# Altium PCB 1069.PcbDoc (part 1 of 3)
Units mil, origin at the board's own origin, x right, y up, seen from the top; angles counter-clockwise.
Board outline 10010 x 6010 mil, 2 copper layers (Top Layer, Bottom Layer); 500 components, 334 nets, 1630 pads, 397 vias.
Unrouted connection lines stored in the file: 1187.
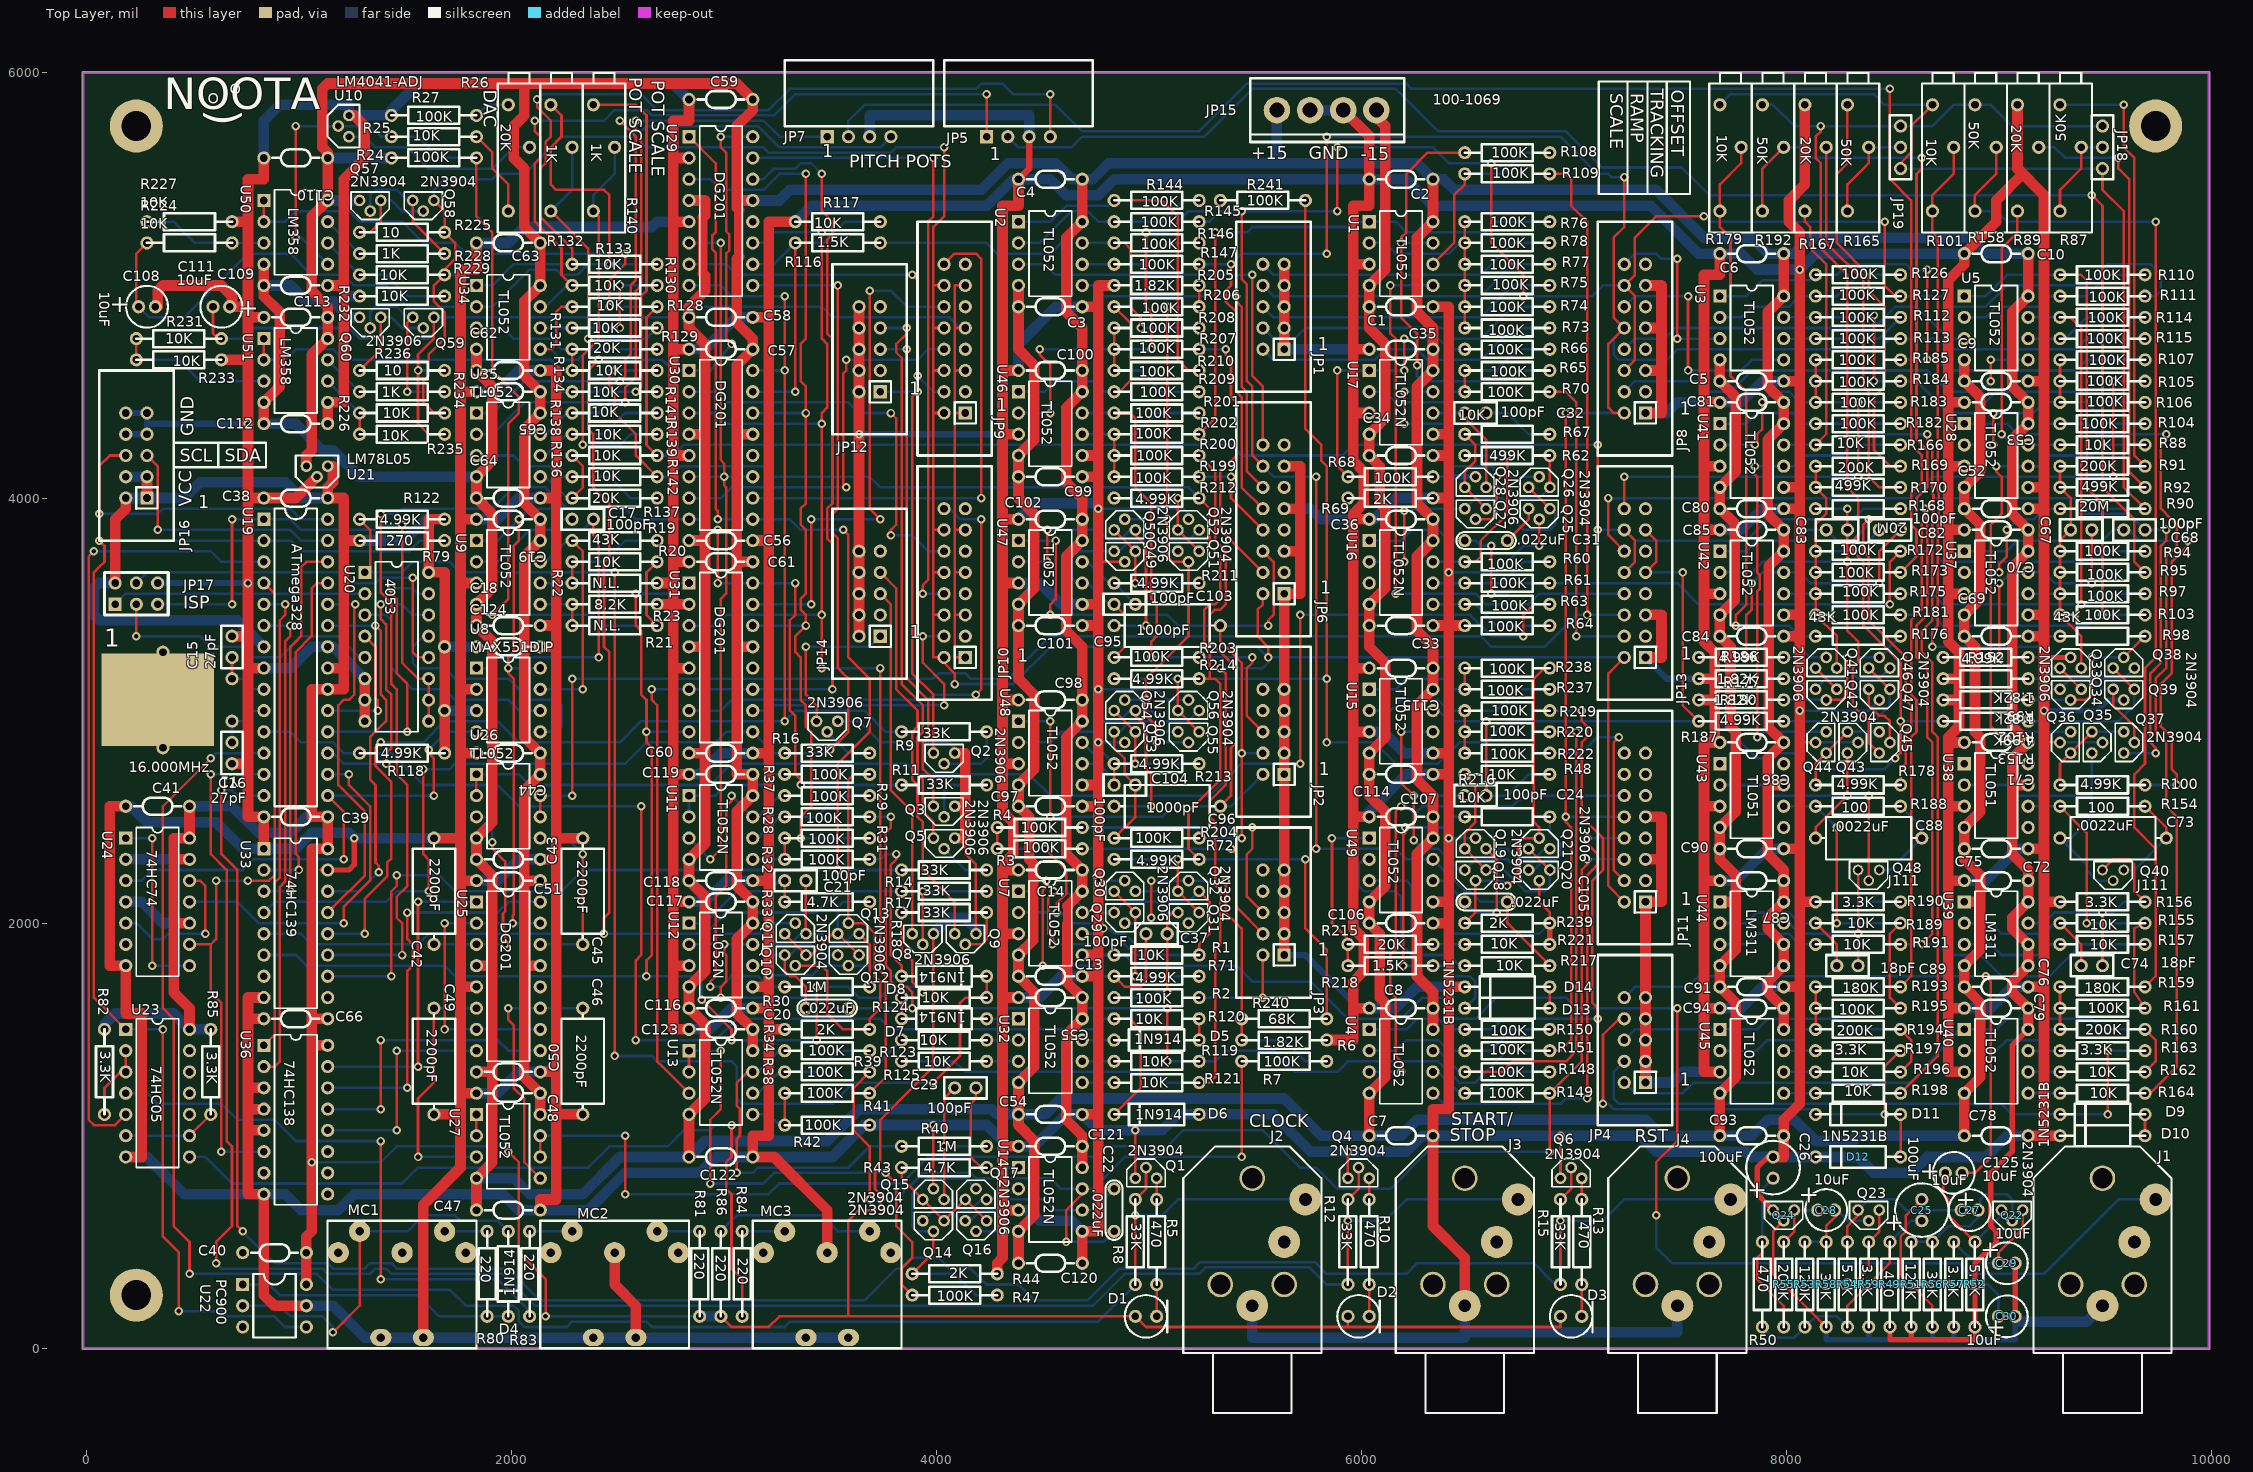
[diagram p0: Top Layer view]
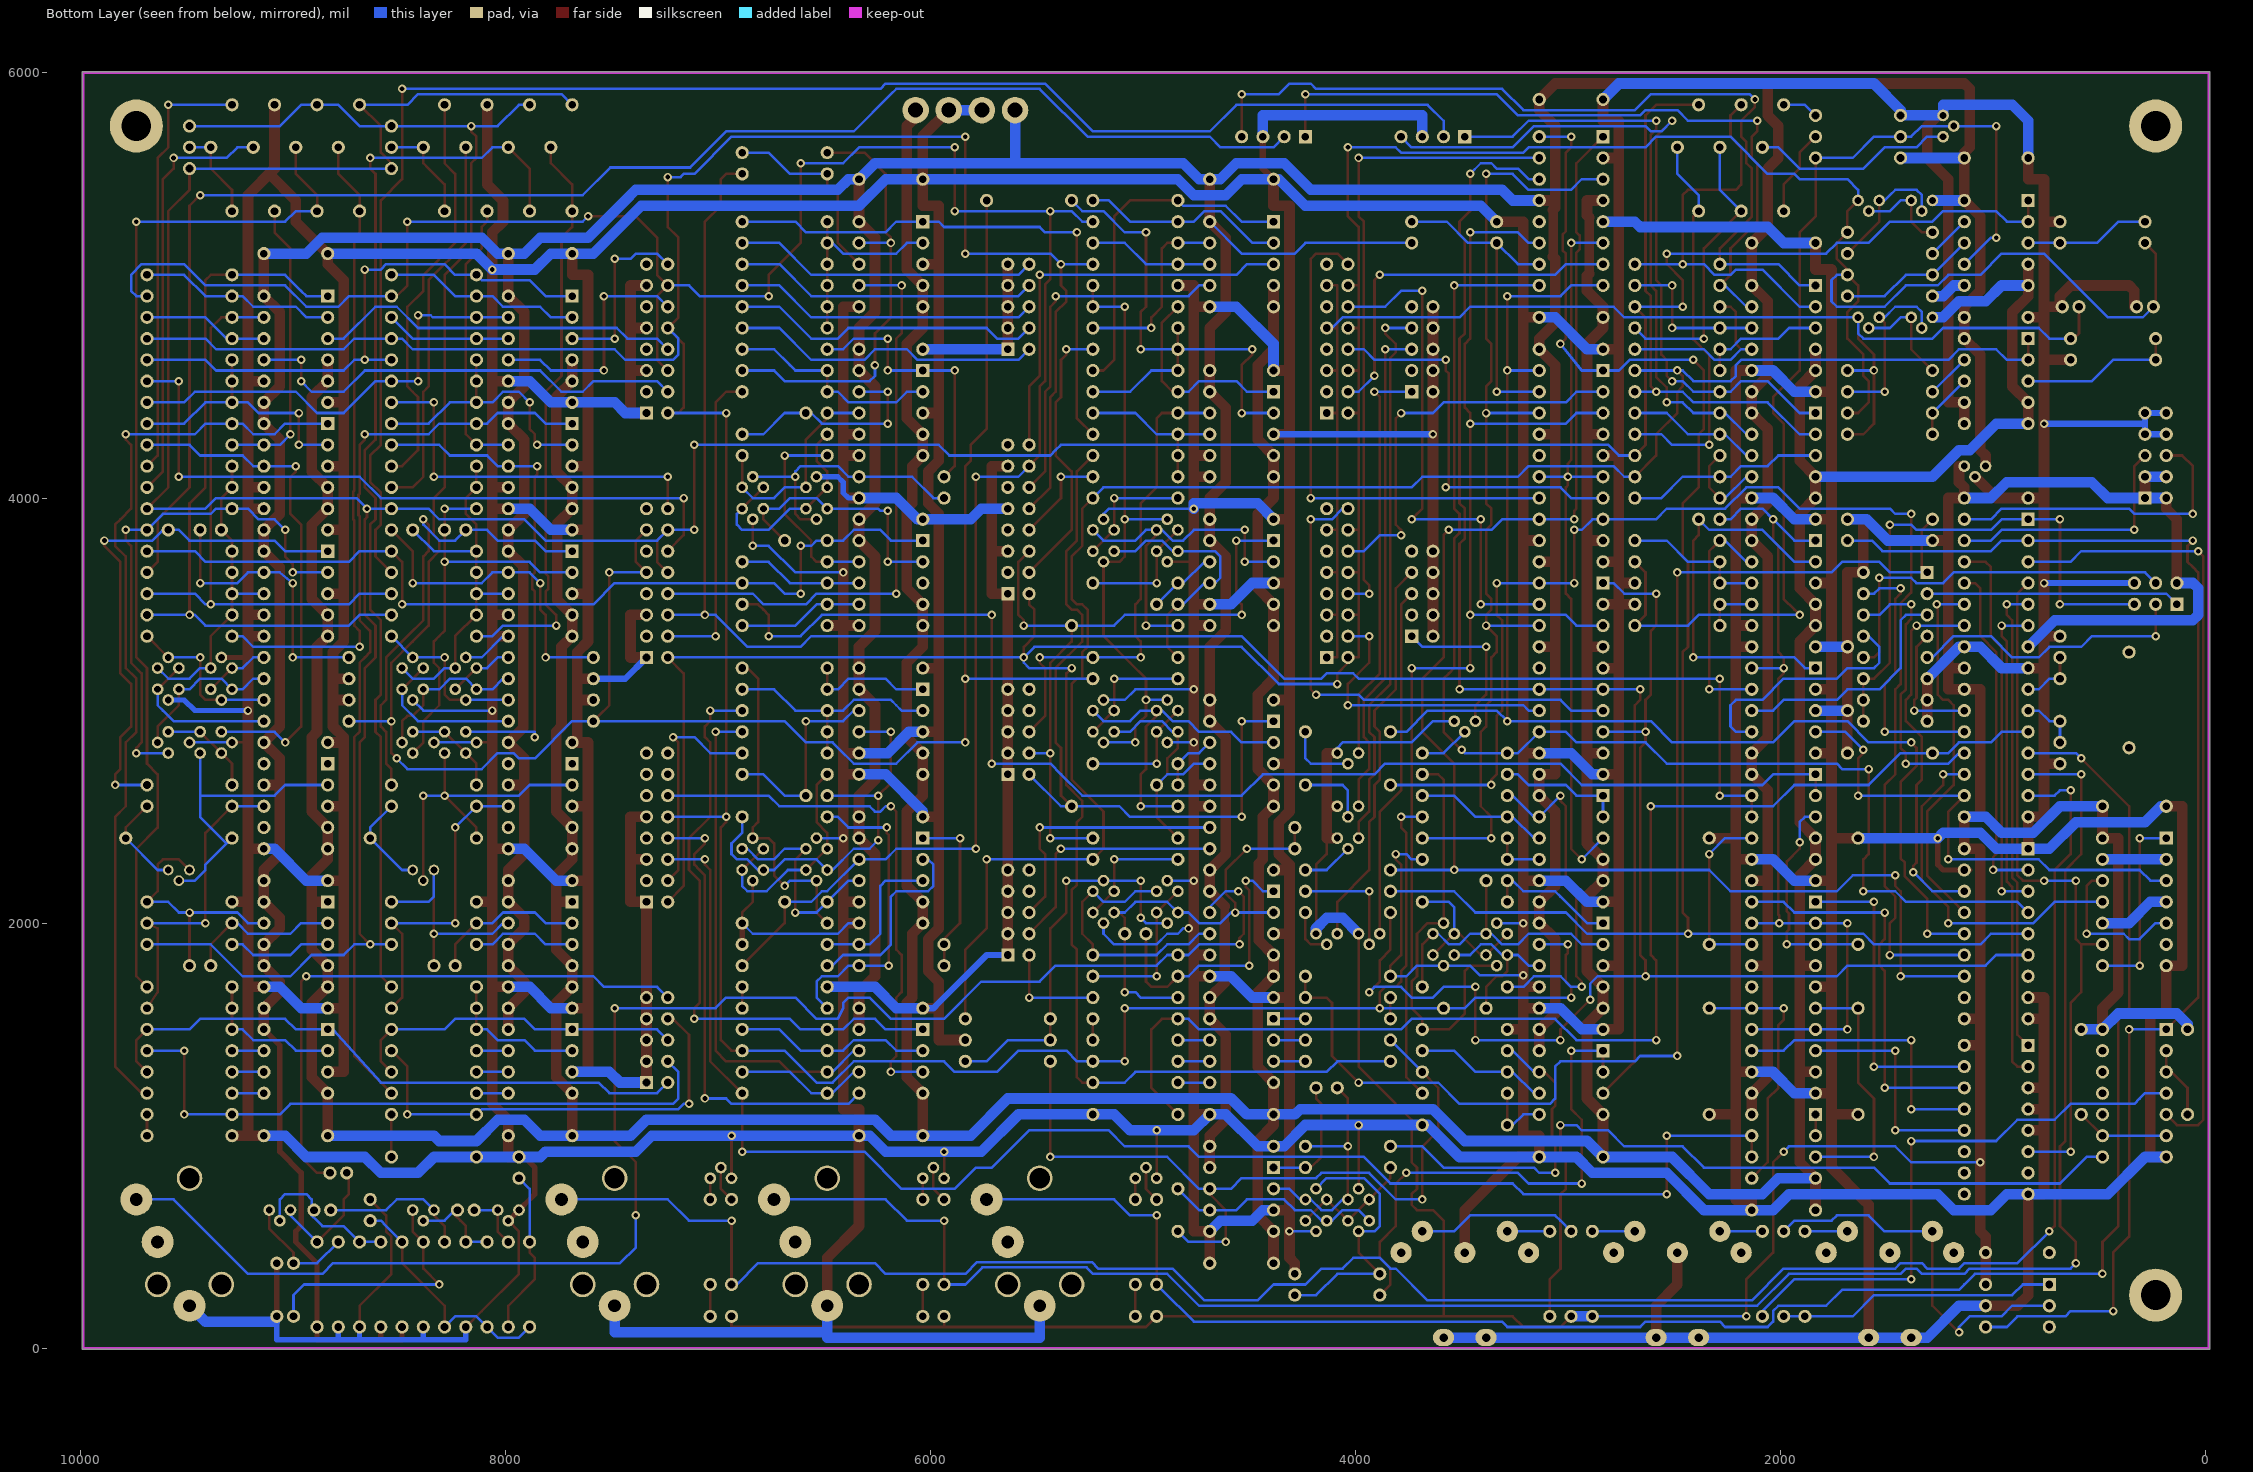
[diagram p1: Bottom Layer view, seen from below]

## Layer stack, top to bottom
Top Layer: signal copper 1.4
Dielectric: dielectric 12.6, FR-4, Dk 4.8
Bottom Layer: signal copper 1.4

## Board outline
-20,-5 9990,-5 9990,6005 -20,6005

## Design rules (kind name [scope] priority, off if disabled: settings)
Clearance [All] p1: gap=10
PlaneClearance [All] p1: clearance=10
PolygonConnect [All] p1: connectstyle=Relief reliefconductorwidth=10 reliefentries=4 polygonreliefangle="90 Angle"
RoutingPriority [All] p1: routingpriority=2
RoutingVias [All] p1: holewidth=20 width=50 viastyle="Through Hole" minholewidth=28 minwidth=50 maxholewidth=28 maxwidth=50
SilkscreenOverComponentPads [All] p1: minsilkscreentomaskgap=10
SolderMaskExpansion [All] p1: expansion=2
TestPointUsage [All] p1: valid=0 allowmultiple=FALSE
Testpoint [All] p1: side=15 testpointundercomponent=TRUE minsize=40 maxsize=100 preferedsize=60 minholesize=0 maxholesize=40 preferedholesize=32 testpointgrid=1 style=1023 order=0-112345678
Width [All] p1: maxlimit=10 minlimit=10 preferedwidth=10
21 further rules are at their usual default settings.

## Components (designator, comment, footprint, x,y, rotation, side; value= is the part's Value field where it differs from the comment)
C1 "0.1uF" AXIALCAP0.3 6035,4900 r0 top
C2 "0.1uF" AXIALCAP0.3 6335,5500 r180 top
C3 "0.1uF" AXIALCAP0.3 4385,4900 r0 top
C4 "0.1uF" AXIALCAP0.3 4685,5500 r180 top
C5 "0.1uF" AXIALCAP0.3 7685,4550 r0 top
C6 "0.1uF" AXIALCAP0.3 7985,5150 r180 top
C7 "0.1uF" AXIALCAP0.3 6035,1000 r0 top
C8 "0.1uF" AXIALCAP0.3 6335,1600 r180 top
C9 "0.1uF" AXIALCAP0.3 8835,4550 r0 top
C10 "0.1uF" AXIALCAP0.3 9135,5150 r180 top
C13 "0.1uF" AXIALCAP0.3 4385,1750 r0 top
C14 "0.1uF" AXIALCAP0.3 4685,2250 r180 top
C15 "27pF" RAD0.1 685,3250 r90 top
C16 "27pF" RAD0.1 685,2850 r270 top
C17 "100pF" RAD0.1 2285,3900 r0 top
C18 "0.1uF" AXIALCAP0.3 1835,3400 r0 top
C19 "0.1uF" AXIALCAP0.3 2135,3900 r180 top
C20 ".022uF" CAP-MY0.2X.1 3385,1600 r0 top
C21 "100pF" RAD0.1 3385,2200 r180 top
C22 ".022uF" CAP-MY0.2X.1 4835,750 r270 top
C23 "100pF" RAD0.1 4085,1225 r0 top
C24 "100pF" RAD0.1 6485,2600 r0 top
C25 "100uF" RB0.3/0.1 8635,600 r90 top
C26 "100uF" RB0.3/0.1 7935,800 r90 top
C27 "10uF" RB5/2 8860,650 r0 top
C28 "10uF" RB5/2 8185,650 r0 top
C29 "10uF" RB5/2 9035,400 r0 top
C30 "10uF" RB5/2 9035,150 r0 top
C31 ".022uF" CAP-MY0.2X.1 6685,3800 r180 top
C32 "100pF" RAD0.1 6485,4400 r0 top
C33 "0.1uF" AXIALCAP0.3 6035,3400 r0 top
C34 "0.1uF" AXIALCAP0.3 6035,4200 r0 top
C35 "0.1uF" AXIALCAP0.3 6335,4700 r180 top
C36 "0.1uF" AXIALCAP0.3 6335,3900 r180 top
C37 "100pF" RAD0.1 5085,1950 r180 top
C38 "0.1uF" AXIALCAP0.3 1135,4000 r180 top
C39 "0.1uF" AXIALCAP0.3 1135,2500 r180 top
C40 "0.1uF" AXIALCAP0.3 1035,450 r180 top
C41 ".1uF" AXIALCAP0.3 485,2550 r180 top
C42 "2200pF" AXIAL0.5X0.2 1635,1900 r90 top
C43 "0.1uF" AXIALCAP0.3 1835,2300 r0 top
C44 "0.1uF" AXIALCAP0.3 2135,2800 r180 top
C45 "2200pF" AXIAL0.5X0.2 2335,1900 r90 top
C46 "2200pF" AXIAL0.5X0.2 2335,1600 r270 top
C47 "0.1uF" AXIALCAP0.3 1835,650 r0 top
C48 "0.1uF" AXIALCAP0.3 2135,1200 r180 top
C49 "2200pF" AXIAL0.5X0.2 1635,1600 r270 top
C50 "0.1uF" AXIALCAP0.3 1835,1300 r0 top
C51 "0.1uF" AXIALCAP0.3 2135,2200 r180 top
C52 "0.1uF" AXIALCAP0.3 8835,3950 r0 top
C53 "0.1uF" AXIALCAP0.3 9135,4450 r180 top
C54 "0.1uF" AXIALCAP0.3 4385,1100 r0 top
C55 "0.1uF" AXIALCAP0.3 4685,1650 r180 top
C56 "0.1uF" AXIALCAP0.3 2835,3800 r0 top
C57 "0.1uF" AXIALCAP0.3 3135,4700 r180 top
C58 "0.1uF" AXIALCAP0.3 2835,4850 r0 top
C59 "0.1uF" AXIALCAP0.3 3135,5875 r180 top
C60 "0.1uF" AXIALCAP0.3 2835,2800 r0 top
C61 "0.1uF" AXIALCAP0.3 3135,3700 r180 top
C62 "0.1uF" AXIALCAP0.3 1835,4600 r0 top
C63 "0.1uF" AXIALCAP0.3 2135,5200 r180 top
C64 "0.1uF" AXIALCAP0.3 1835,4000 r0 top
C65 "0.1uF" AXIALCAP0.3 2135,4500 r180 top
C66 "0.1uF" AXIALCAP0.3 1135,1550 r180 top
C67 "100pF" RAD0.1 9335,3850 r0 top
C68 "100pF" RAD0.1 9685,3850 r180 top
C69 "0.1uF" AXIALCAP0.3 8835,3350 r0 top
C70 "0.1uF" AXIALCAP0.3 9135,3850 r180 top
C71 "0.1uF" AXIALCAP0.3 9135,2850 r180 top
C72 "0.1uF" AXIALCAP0.3 9135,2200 r180 top
C73 ".0022uF" AXIAL0.5X0.2 9285,2400 r0 top
C74 "18pF" RAD0.1 9385,1800 r0 top
C75 "0.1uF" AXIALCAP0.3 8835,2350 r0 top
C76 "0.1uF" AXIALCAP0.3 8835,1700 r0 top
C78 "0.1uF" AXIALCAP0.3 8835,1000 r0 top
C79 "0.1uF" AXIALCAP0.3 9135,1600 r180 top
C80 "0.1uF" AXIALCAP0.3 7685,3950 r0 top
C81 "0.1uF" AXIALCAP0.3 7985,4450 r180 top
C82 "100pF" RAD0.1 8435,3850 r0 top
C83 "100pF" RAD0.1 8285,3850 r180 top
C84 "0.1uF" AXIALCAP0.3 7685,3350 r0 top
C85 "0.1uF" AXIALCAP0.3 7985,3850 r180 top
C86 "0.1uF" AXIALCAP0.3 7985,2850 r180 top
C87 "0.1uF" AXIALCAP0.3 7985,2200 r180 top
C88 ".0022uF" AXIAL0.5X0.2 8135,2400 r0 top
C89 "18pF" RAD0.1 8235,1800 r0 top
C90 "0.1uF" AXIALCAP0.3 7685,2350 r0 top
C91 "0.1uF" AXIALCAP0.3 7685,1700 r0 top
C93 "0.1uF" AXIALCAP0.3 7685,1000 r0 top
C94 "0.1uF" AXIALCAP0.3 7985,1600 r180 top
C95 "1000pF" AXIAL0.5X0.2 5335,3400 r180 top
C96 "1000pF" AXIAL0.5X0.2 5335,2550 r180 top
C97 "0.1uF" AXIALCAP0.3 4385,2550 r0 top
C98 "0.1uF" AXIALCAP0.3 4685,3050 r180 top
C99 "0.1uF" AXIALCAP0.3 4385,4100 r0 top
C100 "0.1uF" AXIALCAP0.3 4685,4600 r180 top
C101 "0.1uF" AXIALCAP0.3 4385,3400 r0 top
C102 "0.1uF" AXIALCAP0.3 4685,3900 r180 top
C103 "100pF" RAD0.1 4835,3500 r0 top
C104 "100pF" RAD0.1 4935,2650 r180 top
C105 ".022uF" CAP-MY0.2X.1 6485,2100 r0 top
C106 "0.1uF" AXIALCAP0.3 6035,2000 r0 top
C107 "0.1uF" AXIALCAP0.3 6335,2500 r180 top
C108 "10uF" RB5/2 285,4900 r0 top
C109 "0.1uF" AXIALCAP0.3 835,5000 r0 top
C110 "0.1uF" AXIALCAP0.3 1135,5600 r180 top
C111 "10uF" RB5/2 635,4900 r180 top
C112 "0.1uF" AXIALCAP0.3 835,4350 r0 top
C113 "0.1uF" AXIALCAP0.3 1135,4850 r180 top
C114 "0.1uF" AXIALCAP0.3 6035,2700 r0 top
C115 "0.1uF" AXIALCAP0.3 6335,3200 r180 top
C116 "0.1uF" AXIALCAP0.3 2835,1600 r0 top
C117 "0.1uF" AXIALCAP0.3 3135,2100 r180 top
C118 "0.1uF" AXIALCAP0.3 2835,2200 r0 top
C119 "0.1uF" AXIALCAP0.3 3135,2700 r180 top
C120 "0.1uF" AXIALCAP0.3 4385,400 r0 top
C121 "0.1uF" AXIALCAP0.3 4685,950 r180 top
C122 "0.1uF" AXIALCAP0.3 2835,900 r0 top
C123 "0.1uF" AXIALCAP0.3 3135,1500 r180 top
C124 "0.1uF" AXIALCAP0.3 1835,3300 r0 top
C125 "10uF" RB5/2 8785,825 r0 top
D1 "LED" LED 4985,150 r180 top
D2 "LED" LED 5985,150 r180 top
D3 "LED" LED 6985,150 r180 top
D4 "1N914" DIODE0.4 1985,150 r180 top
D5 "1N914" DIODE0.4 4835,1450 r90 top
D6 "1N914" DIODE0.4 4835,1100 r90 top
D7 "1N914" DIODE0.4 4235,1550 r270 top
D8 "1N914" DIODE0.4 4235,1750 r270 top
D9 "1N5231B" DIODE0.4 9285,1100 r90 top
D10 "1N5231B" DIODE0.4 9285,1000 r90 top
D11 "1N5231B" DIODE0.4 8135,1100 r90 top
D12 "1N5231B" DIODE0.4 8135,900 r90 top
D13 "1N5231B" DIODE0.4 6485,1600 r90 top
D14 "1N5231B" DIODE0.4 6485,1700 r90 top
J1 "PHONEJACK SW" PHONE-SC112A 9485,200 r270 top
J2 "PHONEJACK SW" PHONE-SC112A 5485,200 r270 top
J3 "PHONEJACK SW" PHONE-SC112A 6485,200 r270 top
J4 "PHONEJACK SW" PHONE-SC112A 7485,200 r270 top
JP1 "HEADER 5X2" IDC10-AMP 5635,4700 r90 top
JP2 "HEADER 5X2" IDC10-AMP 5635,2700 r90 top
JP3 "HEADER 5X2" IDC10-AMP 5635,1850 r90 top
JP4 "HEADER 5X2" IDC10-AMP 7335,1250 r90 top
JP5 "HEADER 4" MODU-4S-RA 4235,5600 r0 top
JP6 "HEADER 8X2" IDC16-AMP 5635,3550 r90 top
JP7 "HEADER 4" MODU-4S-RA 3485,5600 r0 top
JP8 "HEADER 8X2" IDC16-AMP 7335,4400 r90 top
JP9 "HEADER 8X2" IDC16-AMP 4135,4400 r90 top
JP10 "HEADER 8X2" IDC16-AMP 4135,3250 r90 top
JP11 "HEADER 8X2" IDC16-AMP 7335,2100 r90 top
JP12 "HEADER 5X2" IDC10-AMP 3735,4500 r90 top
JP13 "HEADER 8X2" IDC16-AMP 7335,3250 r90 top
JP14 "HEADER 5X2" IDC10-AMP 3735,3350 r90 top
JP15 "HEADER 4" MTA-4X0.156 5835,5825 r0 top
JP16 "HEADER 5X2" IDC10-AMP 285,4000 r90 top
JP17 "HEADER 3X2" JMPR6 135,3500 r90 top
JP18 "HEADER 3" JP3 9485,5550 r90 top
JP19 "HEADER 3" JP3 8535,5550 r90 top
MC1 "DIN 5" "DIN 5 PIN A"#1 1485,450 r0 top
MC2 "DIN 5" "DIN 5 PIN A"#2 2485,450 r0 top
MC3 "DIN 5" "DIN 5 PIN A"#1 3485,450 r0 top
Q1 "2N3904" TO92 4985,850 r180 top
Q2 "2N3906" TO92 4035,2750 r0 top
Q3 "2N3906" TO92 4035,2500 r0 top
Q4 "2N3904" TO92 5985,850 r180 top
Q5 "2N3906" TO92 4035,2350 r0 top
Q6 "2N3904" TO92 6985,850 r180 top
Q7 "2N3906" TO92 3485,2900 r0 top
Q8 "2N3906" TO92 3935,1900 r0 top
Q9 "2N3906" TO92 4135,1900 r0 top
Q10 "2N3904" TO92 3335,1800 r0 top
Q11 "2N3904" TO92 3335,2000 r180 top
Q12 "2N3906" TO92 3585,1800 r0 top
Q13 "2N3906" TO92 3585,2000 r180 top
Q14 "2N3904" TO92 3985,550 r0 top
Q15 "2N3904" TO92 3985,750 r180 top
Q16 "2N3906" TO92 4185,550 r0 top
Q17 "2N3906" TO92 4185,750 r180 top
Q18 "2N3904" TO92 6535,2200 r0 top
Q19 "2N3904" TO92 6535,2400 r180 top
Q20 "2N3906" TO92 6835,2200 r0 top
Q21 "2N3906" TO92 6835,2400 r180 top
Q22 "2N3904" TO92 9060,600 r0 top
Q23 "2N3904" TO92 8385,600 r0 top
Q24 "2N3904" TO92 7985,600 r0 top
Q25 "2N3904" TO92 6835,3900 r0 top
Q26 "2N3904" TO92 6835,4100 r180 top
Q27 "2N3906" TO92 6535,3900 r0 top
Q28 "2N3906" TO92 6535,4100 r180 top
Q29 "2N3906" TO92 4885,2000 r0 top
Q30 "2N3906" TO92 4885,2200 r180 top
Q31 "2N3904" TO92 5185,2000 r0 top
Q32 "2N3904" TO92 5185,2200 r180 top
Q33 "2N3906" TO92 9335,3250 r180 top
Q34 "2N3906" TO92 9335,3050 r0 top
Q35 "2N3904" TO92 9485,2850 r90 top
Q36 "2N3904" TO92 9285,2850 r270 top
Q37 "2N3904" TO92 9635,2850 r90 top
Q38 "2N3904" TO92 9585,3250 r180 top
Q39 "2N3904" TO92 9585,3050 r0 top
Q40 "J111" TO92-J111 9535,2200 r0 top
Q41 "2N3906" TO92 8185,3250 r180 top
Q42 "2N3906" TO92 8185,3050 r0 top
Q43 "2N3904" TO92 8335,2850 r90 top
Q44 "2N3904" TO92 8135,2850 r270 top
Q45 "2N3904" TO92 8485,2850 r90 top
Q46 "2N3904" TO92 8435,3250 r180 top
Q47 "2N3904" TO92 8435,3050 r0 top
Q48 "J111" TO92-J111 8385,2200 r0 top
Q49 "2N3906" TO92 4885,3700 r0 top
Q50 "2N3906" TO92 4885,3900 r180 top
Q51 "2N3904" TO92 5185,3700 r0 top
Q52 "2N3904" TO92 5185,3900 r180 top
Q53 "2N3906" TO92 4885,2850 r0 top
Q54 "2N3906" TO92 4885,3050 r180 top
Q55 "2N3904" TO92 5185,2850 r0 top
Q56 "2N3904" TO92 5185,3050 r180 top
Q57 "2N3904" TO92 1335,5350 r0 top
Q58 "2N3904" TO92 1585,5350 r0 top
Q59 "2N3906" TO92 1585,4800 r0 top
Q60 "2N3906" TO92 1335,4800 r0 top
R1 "10K" AXIAL0.4 5235,1850 r180 top
R2 "100K" AXIAL0.4 5235,1650 r180 top
R3 "100K" AXIAL0.4 4685,2350 r180 top
R4 "100K" AXIAL0.4 4685,2450 r180 top
R5 "470" AXIAL0.4 5035,700 r270 top
R6 "1.82K" AXIAL0.4 5435,1450 r0 top
R7 "100K" AXIAL0.4 5435,1350 r0 top
R8 "33K" AXIAL0.4 4935,300 r90 top
R9 "33K" AXIAL0.4 3835,2900 r0 top
R10 "470" AXIAL0.4 6035,700 r270 top
R11 "33K" AXIAL0.4 3835,2650 r0 top
R12 "33K" AXIAL0.4 5935,300 r90 top
R13 "470" AXIAL0.4 7035,700 r270 top
R14 "33K" AXIAL0.4 3835,2250 r0 top
R15 "33K" AXIAL0.4 6935,300 r90 top
R16 "33K" AXIAL0.4 3285,2800 r0 top
R17 "33K" AXIAL0.4 3835,2150 r0 top
R18 "33K" AXIAL0.4 3835,2050 r0 top
R19 "43K" AXIAL0.4 2685,3800 r180 top
R20 "10K" AXIAL0.4 2685,3700 r180 top
R21 "N.L." AXIAL0.4 2685,3400 r180 top
R22 "N.L." AXIAL0.4 2285,3600 r0 top
R23 "8.2K" AXIAL0.4 2285,3500 r0 top
R24 "10K" AXIAL0.4 1435,5600 r0 top
R25 "100K" AXIAL0.4 1435,5700 r0 top
R26 "20K" TRIMPOT-3006 1985,5850 r0 top
R27 "100K" AXIAL0.4 1435,5800 r0 top
R28 "100K" AXIAL0.4 3285,2500 r0 top
R29 "100K" AXIAL0.4 3685,2600 r180 top
R30 "1M" AXIAL0.4 3285,1700 r0 top
R31 "100K" AXIAL0.4 3685,2400 r180 top
R32 "100K" AXIAL0.4 3285,2300 r0 top
R33 "4.7K" AXIAL0.4 3285,2100 r0 top
R34 "2K" AXIAL0.4 3685,1500 r180 top
R37 "100K" AXIAL0.4 3285,2700 r0 top
R38 "100K" AXIAL0.4 3285,1300 r0 top
R39 "100K" AXIAL0.4 3685,1400 r180 top
R40 "1M" AXIAL0.4 3835,950 r0 top
R41 "100K" AXIAL0.4 3685,1200 r180 top
R42 "100K" AXIAL0.4 3285,1050 r0 top
R43 "4.7K" AXIAL0.4 4235,850 r180 top
R44 "2K" AXIAL0.4 3885,350 r0 top
R47 "100K" AXIAL0.4 3885,250 r0 top
R48 "10K" AXIAL0.4 6485,2700 r0 top
R49 "470" AXIAL0.4 8485,500 r270 top
R50 "470" AXIAL0.4 7885,100 r90 top
R51 "120K" AXIAL0.4 8585,100 r90 top
R52 "5.6K" AXIAL0.4 8885,100 r90 top
R53 "120K" AXIAL0.4 8085,100 r90 top
R54 "5.6K" AXIAL0.4 8285,100 r90 top
R55 "200K" AXIAL0.4 7985,100 r90 top
R56 "39K" AXIAL0.4 8685,500 r270 top
R57 "3.3K" AXIAL0.4 8785,500 r270 top
R58 "39K" AXIAL0.4 8185,500 r270 top
R59 "3.3K" AXIAL0.4 8385,500 r270 top
R60 "100K" AXIAL0.4 6885,3700 r180 top
R61 "100K" AXIAL0.4 6885,3600 r180 top
R62 "499K" AXIAL0.4 6485,4200 r0 top
R63 "100K" AXIAL0.4 6885,3500 r180 top
R64 "100K" AXIAL0.4 6885,3400 r180 top
R65 "100K" AXIAL0.4 6885,4600 r180 top
R66 "100K" AXIAL0.4 6885,4700 r180 top
R67 "10K" AXIAL0.4 6485,4300 r0 top
R68 "100K" AXIAL0.4 5935,4100 r0 top
R69 "2K" AXIAL0.4 5935,4000 r0 top
R70 "100K" AXIAL0.4 6885,4500 r180 top
R71 "4.99K" AXIAL0.4 4835,1750 r0 top
R72 "4.99K" AXIAL0.4 4835,2300 r0 top
R73 "100K" AXIAL0.4 6885,4800 r180 top
R74 "100K" AXIAL0.4 6885,4900 r180 top
R75 "100K" AXIAL0.4 6885,5000 r180 top
R76 "100K" AXIAL0.4 6485,5300 r0 top
R77 "100K" AXIAL0.4 6885,5100 r180 top
R78 "100K" AXIAL0.4 6885,5200 r180 top
R79 "270" AXIAL0.4 1285,3800 r0 top
R80 "220" AXIAL0.4 1885,550 r270 top
R81 "220" AXIAL0.4 2885,550 r270 top
R82 "3.3K" AXIAL0.4 85,1500 r270 top
R83 "220" AXIAL0.4 2085,150 r90 top
R84 "220" AXIAL0.4 3085,150 r90 top
R85 "3.3K" AXIAL0.4 585,1100 r90 top
R86 "220" AXIAL0.4 2985,550 r270 top
R87 "50K" TRIMPOT-3006 9285,5850 r0 top
R88 "10K" AXIAL0.4 9285,4250 r0 top
R89 "20K" TRIMPOT-3006 9085,5850 r0 top
R90 "20M" AXIAL0.4 9685,3950 r180 top
R91 "200K" AXIAL0.4 9685,4150 r180 top
R92 "499K" AXIAL0.4 9285,4050 r0 top
R94 "100K" AXIAL0.4 9685,3750 r180 top
R95 "100K" AXIAL0.4 9685,3650 r180 top
R97 "100K" AXIAL0.4 9685,3550 r180 top
R98 "43K" AXIAL0.4 9285,3350 r0 top
R99 "1.82K" AXIAL0.4 9135,3150 r180 top
R100 "4.99K" AXIAL0.4 9285,2650 r0 top
R101 "10K" TRIMPOT-3006 8685,5850 r0 top
R102 "1.82k" AXIAL0.4 9135,3050 r180 top
R103 "100K" AXIAL0.4 9685,3450 r180 top
R104 "100K" AXIAL0.4 9685,4350 r180 top
R105 "100K" AXIAL0.4 9685,4550 r180 top
R106 "100K" AXIAL0.4 9685,4450 r180 top
R107 "100K" AXIAL0.4 9685,4650 r180 top
R108 "100K" AXIAL0.4 6885,5625 r180 top
R109 "100K" AXIAL0.4 6885,5525 r180 top
R110 "100K" AXIAL0.4 9685,5050 r180 top
R111 "100K" AXIAL0.4 9685,4950 r180 top
R112 "100K" AXIAL0.4 8535,4850 r180 top
R113 "100K" AXIAL0.4 8535,4750 r180 top
R114 "100K" AXIAL0.4 9685,4850 r180 top
R115 "100K" AXIAL0.4 9685,4750 r180 top
R116 "1.5K" AXIAL0.4 3735,5200 r180 top
R117 "10K" AXIAL0.4 3735,5300 r180 top
R118 "4.99K" AXIAL0.4 1685,2800 r180 top
R119 "10K" AXIAL0.4 5235,1350 r180 top
R120 "10K" AXIAL0.4 5235,1550 r180 top
R121 "10K" AXIAL0.4 5235,1250 r180 top
R122 "4.99K" AXIAL0.4 1685,3900 r180 top
R123 "10K" AXIAL0.4 3835,1450 r0 top
R124 "10K" AXIAL0.4 3835,1650 r0 top
R125 "10K" AXIAL0.4 3835,1350 r0 top
R126 "100K" AXIAL0.4 8535,5050 r180 top
R127 "100K" AXIAL0.4 8535,4950 r180 top
R128 "10K" AXIAL0.4 2685,4900 r180 top
R129 "20K" AXIAL0.4 2685,4700 r180 top
R130 "10K" AXIAL0.4 2685,5000 r180 top
R131 "10K" AXIAL0.4 2285,4800 r0 top
R132 "1K" TRIMPOT-3006 2185,5850 r0 top
R133 "10K" AXIAL0.4 2685,5100 r180 top
R134 "10K" AXIAL0.4 2685,4600 r180 top
R136 "10K" AXIAL0.4 2685,4200 r180 top
R137 "20K" AXIAL0.4 2285,4000 r0 top
R138 "10K" AXIAL0.4 2685,4400 r180 top
R139 "10K" AXIAL0.4 2285,4300 r0 top
R140 "1K" TRIMPOT-3006 2385,5850 r0 top
R141 "10K" AXIAL0.4 2685,4500 r180 top
R142 "10K" AXIAL0.4 2685,4100 r180 top
R144 "100K" AXIAL0.4 5235,5400 r180 top
R145 "100K" AXIAL0.4 5235,5300 r180 top
R146 "100K" AXIAL0.4 5235,5200 r180 top
R147 "100K" AXIAL0.4 5235,5100 r180 top
R148 "100K" AXIAL0.4 6885,1300 r180 top
R149 "100K" AXIAL0.4 6885,1200 r180 top
R150 "100K" AXIAL0.4 6885,1500 r180 top
R151 "100K" AXIAL0.4 6885,1400 r180 top
R152 "4.99K" AXIAL0.4 8735,3250 r0 top
R153 "4.99K" AXIAL0.4 9135,2950 r180 top
R154 "100" AXIAL0.4 9685,2550 r180 top
R155 "10K" AXIAL0.4 9685,2000 r180 top
R156 "3.3K" AXIAL0.4 9685,2100 r180 top
R157 "10K" AXIAL0.4 9685,1900 r180 top
R158 "50K" TRIMPOT-3006 8885,5850 r0 top
R159 "180K" AXIAL0.4 9685,1700 r180 top
R160 "200K" AXIAL0.4 9285,1500 r0 top
R161 "100K" AXIAL0.4 9685,1600 r180 top
R162 "10K" AXIAL0.4 9685,1300 r180 top
R163 "3.3K" AXIAL0.4 9285,1400 r0 top
R164 "10K" AXIAL0.4 9685,1200 r180 top
R165 "50K" TRIMPOT-3006 8285,5850 r0 top
R166 "10K" AXIAL0.4 8135,4250 r0 top
R167 "20K" TRIMPOT-3006 8085,5850 r0 top
R168 "20M" AXIAL0.4 8535,3950 r180 top
R169 "200K" AXIAL0.4 8535,4150 r180 top
R170 "499K" AXIAL0.4 8135,4050 r0 top
R172 "100K" AXIAL0.4 8535,3750 r180 top
R173 "100K" AXIAL0.4 8535,3650 r180 top
R175 "100K" AXIAL0.4 8535,3550 r180 top
R176 "43K" AXIAL0.4 8135,3350 r0 top
R177 "1.82K" AXIAL0.4 7985,3150 r180 top
R178 "4.99K" AXIAL0.4 8135,2650 r0 top
R179 "10K" TRIMPOT-3006 7685,5850 r0 top
R180 "1.82k" AXIAL0.4 7985,3050 r180 top
R181 "100K" AXIAL0.4 8535,3450 r180 top
R182 "100K" AXIAL0.4 8535,4350 r180 top
R183 "100K" AXIAL0.4 8535,4450 r180 top
R184 "100K" AXIAL0.4 8535,4550 r180 top
R185 "100K" AXIAL0.4 8535,4650 r180 top
R186 "4.99K" AXIAL0.4 7585,3250 r0 top
R187 "4.99K" AXIAL0.4 7985,2950 r180 top
R188 "100" AXIAL0.4 8535,2550 r180 top
R189 "10K" AXIAL0.4 8535,2000 r180 top
R190 "3.3K" AXIAL0.4 8535,2100 r180 top
R191 "10K" AXIAL0.4 8535,1900 r180 top
R192 "50K" TRIMPOT-3006 7885,5850 r0 top
R193 "180K" AXIAL0.4 8535,1700 r180 top
R194 "200K" AXIAL0.4 8135,1500 r0 top
R195 "100K" AXIAL0.4 8535,1600 r180 top
R196 "10K" AXIAL0.4 8535,1300 r180 top
R197 "3.3K" AXIAL0.4 8135,1400 r0 top
R198 "10K" AXIAL0.4 8535,1200 r180 top
R199 "100K" AXIAL0.4 4835,4100 r0 top
R200 "100K" AXIAL0.4 4835,4200 r0 top
R201 "100K" AXIAL0.4 5235,4400 r180 top
R202 "100K" AXIAL0.4 5235,4300 r180 top
R203 "100K" AXIAL0.4 5235,3250 r180 top
R204 "100K" AXIAL0.4 5235,2400 r180 top
R205 "1.82K" AXIAL0.4 5235,5000 r180 top
R206 "100K" AXIAL0.4 4835,4900 r0 top
R207 "100K" AXIAL0.4 5235,4700 r180 top
R208 "100K" AXIAL0.4 5235,4800 r180 top
R209 "100K" AXIAL0.4 5235,4500 r180 top
R210 "100K" AXIAL0.4 5235,4600 r180 top
R211 "4.99K" AXIAL0.4 4835,3600 r0 top
R212 "4.99K" AXIAL0.4 4835,4000 r0 top
R213 "4.99K" AXIAL0.4 4835,2750 r0 top
R214 "4.99K" AXIAL0.4 4835,3150 r0 top
R215 "20K" AXIAL0.4 6335,1900 r180 top
R216 "10K" AXIAL0.4 6485,2500 r0 top
R217 "10K" AXIAL0.4 6885,1800 r180 top
R218 "1.5K" AXIAL0.4 5935,1800 r0 top
R219 "100K" AXIAL0.4 6485,3000 r0 top
R220 "100K" AXIAL0.4 6885,2900 r180 top
R221 "10K" AXIAL0.4 6885,1900 r180 top
R222 "100K" AXIAL0.4 6885,2800 r180 top
R224 "10K" AXIAL0.4 285,5200 r0 top
R225 "10" AXIAL0.4 1285,5250 r0 top
R226 "10K" AXIAL0.4 1685,4400 r180 top
R227 "10K" AXIAL0.4 285,5300 r0 top
R228 "1K" AXIAL0.4 1685,5150 r180 top
R229 "10K" AXIAL0.4 1285,5050 r0 top
R231 "10K" AXIAL0.4 635,4750 r180 top
R232 "10K" AXIAL0.4 1685,4950 r180 top
R233 "10K" AXIAL0.4 635,4650 r180 top
R234 "1K" AXIAL0.4 1685,4500 r180 top
R235 "10K" AXIAL0.4 1285,4300 r0 top
R236 "10" AXIAL0.4 1285,4600 r0 top
R237 "100K" AXIAL0.4 6885,3100 r180 top
R238 "100K" AXIAL0.4 6485,3200 r0 top
R239 "2K" AXIAL0.4 6885,2000 r180 top
R240 "68K" AXIAL0.4 5435,1550 r0 top
R241 "100K" AXIAL0.4 5735,5400 r180 top
U1 "TL052" DIP8 6035,5300 r0 top
U2 "TL052" DIP8 4385,5300 r0 top
U3 "TL052" DIP8 7685,4950 r0 top
U4 "TL052" DIP8 6035,1500 r0 top
U5 "TL052" DIP8 8835,4950 r0 top
U7 "TL052" DIP8 4385,2150 r0 top
U8 "MAX551DIP" DIP8 1835,3200 r0 top
U9 "TL052" DIP8 1835,3800 r0 top
U10 "LM4041-ADJ" TO92-LM336 1235,5750 r270 top
U11 "TL052N" DIP8 2835,2600 r0 top
U12 "TL052N" DIP8 2835,2000 r0 top
U13 "TL052N" DIP8 2835,1400 r0 top
U14 "TL052N" DIP8 4385,850 r0 top
U15 "TL052" DIP8 6035,3100 r0 top
U16 "TL052N" DIP8 6035,3800 r0 top
U17 "TL052N" DIP8 6035,4600 r0 top
U19 "ATmega328" DIP28.3 835,3900 r270 top
U20 "4053" DIP16 1310,3650 r0 top
U21 "LM78L05" TO92-LM336 1085,4150 r0 top
U22 "PC900" DIP6 735,300 r0 top
U23 "74HC05" DIP14 185,1500 r0 top
U24 "74HC74" DIP14 185,2400 r0 top
U25 "DG201" DIP16 1835,2100 r0 top
U26 "TL052" DIP8 1835,2700 r0 top
U27 "TL052" DIP8 1835,1100 r0 top
U28 "TL052" DIP8 8835,4350 r0 top
U29 "DG201" DIP16 2835,5700 r0 top
U30 "DG201" DIP16 2835,4600 r0 top
U31 "DG201" DIP16 2835,3600 r0 top
U32 "TL052" DIP8 4385,1550 r0 top
U33 "74HC139" DIP16 835,2350 r0 top
U34 "TL052" DIP8 1835,5000 r0 top
U35 "TL052" DIP8 1835,4400 r0 top
U36 "74HC138" DIP16 835,1425 r0 top
U37 "TL052" DIP8 8835,3750 r0 top
U38 "TL051" DIP8 8835,2750 r0 top
U39 "LM311" DIP8 8835,2100 r0 top
U40 "TL052" DIP8 8835,1500 r0 top
U41 "TL052" DIP8 7685,4350 r0 top
U42 "TL052" DIP8 7685,3750 r0 top
U43 "TL051" DIP8 7685,2750 r0 top
U44 "LM311" DIP8 7685,2100 r0 top
U45 "TL052" DIP8 7685,1500 r0 top
U46 "TL052" DIP8 4385,4500 r0 top
U47 "TL052" DIP8 4385,3800 r0 top
U48 "TL052" DIP8 4385,2950 r0 top
U49 "TL052" DIP8 6035,2400 r0 top
U50 "LM358" DIP8 835,5400 r0 top
U51 "LM358" DIP8 835,4750 r0 top
Y1 "16.000MHz" XTAL 685,2950 r180 top

## Footprints (in the part's own frame and the unit in brackets; to place one, negate y for a bottom-side part, rotate by r counter-clockwise, add the part's x,y. Pads: shape width x height; smd on the part's side, far side on the other; paste and mask are expansions set on the pad)
AXIAL0.4 [mil]
  round 62 hole 36: 1(0,0) 2(400,0)
  silkscreen extent 0,-40 400,40
AXIAL0.5X0.2 [mil]
  round 62 hole 36: 1(0,0) 2(500,0)
  silkscreen extent 30,-100 470,100
AXIALCAP0.3 [mil]
  round 62 hole 36: 1(0,0) 2(300,0)
  silkscreen extent 40,-40 260,40
CAP-MY0.2X.1 [mil]
  round 62 hole 36: 1(0,0) 2(200,0)
  silkscreen extent -40,-40 240,40
"DIN 5 PIN A"#1 [mil]
  round 100 hole 40: 1(300,0) 2(0,0) 3(-300,0) 4(200,100) 5(-200,100)
  oval 100x80 hole 40: 6(-100,-400) 7(100,-400)
  silkscreen extent -350,-450 350,150
"DIN 5 PIN A"#2 [mil]
  round 100 hole 40: 1(300,0) 2(0,0) 3(-300,0) 4(200,100) 5(-200,100)
  oval 100x80 hole 40 mask+3: 6(-100,-400)
  oval 100x80 hole 40: 7(100,-400)
  silkscreen extent -350,-450 350,150
DIODE0.4 [mil]
  round 62 hole 36: ANOD(0,-400) CATH(0,0)
  silkscreen extent -50,-400 50,0
DIP6 [mil]
  rect 62x62 hole 36: 1(0,0)
  round 62 hole 36: 2(0,-100) 3(0,-200) 4(300,-200) 5(300,-100) 6(300,0)
  silkscreen extent 50,-250 250,50
DIP8 [mil]
  rect 62x62 hole 36: 1(0,0)
  round 62 hole 36: 2(0,-100) 3(0,-200) 4(0,-300) 5(300,-300) 6(300,-200) 7(300,-100) 8(300,0)
  silkscreen extent 50,-350 250,50
DIP14 [mil]
  rect 62x62 hole 36: 1(0,0)
  round 62 hole 36: 2(0,-100) 3(0,-200) 4(0,-300) 5(0,-400) 6(0,-500) 7(0,-600) 8(300,-600) 9(300,-500) 10(300,-400) 11(300,-300) 12(300,-200) 13(300,-100) 14(300,0)
  silkscreen extent 50,-650 250,50
DIP16 [mil]
  rect 62x62 hole 36: 1(0,0)
  round 62 hole 36: 2(0,-100) 3(0,-200) 4(0,-300) 5(0,-400) 6(0,-500) 7(0,-600) 8(0,-700) 9(300,-700) 10(300,-600) 11(300,-500) 12(300,-400) 13(300,-300) 14(300,-200) 15(300,-100) 16(300,0)
  silkscreen extent 50,-750 250,50
DIP28.3 [mil]
  rect 62x62 hole 36: 1(0,0)
  round 62 hole 36: 2(100,0) 3(200,0) 4(300,0) 5(400,0) 6(500,0) 7(600,0) 8(700,0) 9(800,0) 10(900,0) 11(1000,0) 12(1100,0) 13(1200,0) 14(1300,0) 15(1300,300) 16(1200,300) 17(1100,300) 18(1000,300) 19(900,300) 20(800,300) 21(700,300) 22(600,300) 23(500,300) 24(400,300) 25(300,300) 26(200,300) 27(100,300) 28(0,300)
  silkscreen extent -50,50 1350,250
IDC10-AMP [mil]
  rect 62x62 hole 36: 1(0,0)
  round 62 hole 36: 2(0,100) 3(100,0) 4(100,100) 5(200,0) 6(200,100) 7(300,0) 8(300,100) 9(400,0) 10(400,100)
  silkscreen extent -200,-125 600,225
IDC16-AMP [mil]
  rect 62x62 hole 36: 1(0,0)
  round 62 hole 36: 2(0,100) 3(100,0) 4(100,100) 5(200,0) 6(200,100) 7(300,0) 8(300,100) 9(400,0) 10(400,100) 11(500,0) 12(500,100) 13(600,0) 14(600,100) 15(700,0) 16(700,100)
  silkscreen extent -200,-125 900,225
JMPR6 [mil]
  rect 62x62 hole 36: 1(0,0)
  round 62 hole 36: 2(100,0) 3(0,-100) 4(100,-100) 5(0,-200) 6(100,-200)
  silkscreen extent -50,-250 150,50
JP3 [mil]
  round 62 hole 36: 1(0,0) 2(100,0) 3(200,0)
  silkscreen extent -50,-50 250,50
LED [mil]
  round 62 hole 36: ANOD(50,0) CATH(-50,0)
  silkscreen extent -100,-100 100,100
MODU-4S-RA [mil]
  rect 62x62 hole 36: 1(0,100)
  round 62 hole 36: 2(100,100) 3(200,100) 4(300,100)
  silkscreen extent -200,150 500,460
MTA-4X0.156 [mil]
  round 125 hole 70: 1(-234,0) 2(-78,0) 3(78,0) 4(234,0)
  silkscreen extent -359,-150 366,150
PHONE-SC112A [mil]
  round 150 hole 60: 1(-500,250) 2(-300,150) 3(0,0)
  round 120 hole 95: 7(-600,0) 8(-100,-150) 9(-100,150)
  silkscreen extent -750,-325 505,325
RAD0.1 [mil]
  round 62 hole 36: 1(0,0) 2(100,0)
  silkscreen extent -50,-50 150,50
RB0.3/0.1 [mil]
  round 62 hole 36: 1(0,0) 2(100,0)
  silkscreen extent -76,-126 176,126
RB5/2 [mil]
  round 62 hole 36: 1(-39.37,0) 2(39.37,0)
  silkscreen extent -98,-98 98,98
TO92 [mil]
  round 55 hole 32: BASE(0,0) COLL(-50,50) EMIT(50,50)
  silkscreen extent -90,-40 90,90
TO92-J111 [mil]
  round 50 hole 32: DRAI(50,50) GATE(-50,50) SOUR(0,0)
  silkscreen extent -90,-40 90,90
TO92-LM336 [mil]
  round 55 hole 32: 1(50,0) 2(0,-50) 3(-50,0)
  silkscreen extent -100,-100 100,50
TRIMPOT-3006 [mil]
  round 62 hole 36: A(0,0) B(0,-500) WIPE(100,-200)
  silkscreen extent -50,-600 150,150
XTAL [mil]
  round 62 hole 36: 0(325,125) 0(325,-325) 1(0,0) 2(0,-200)
  rect 530x435 smd: 0(350,-100)

## Free pads (board coordinates)
  round 250 hole 140: 1(9735,5750) 2(235,5750) 3(235,250)

## Via types
v1: diameter 40, hole 22, Top Layer to Bottom Layer, 395 vias
v2: diameter 62, hole 36, Top Layer to Bottom Layer, 2 vias

## Nets (pads, with @x,y where several pads share a name; then routed paths per layer and width w, separated by ;. In a path a pad name is that pad's centre, name@x,y a point inside that pad or via, vN(x,y) a via of type N, cw(c..) or ccw(c..) an arc to the next point about the centre after c; other vN are vias at no path point)
+5VR: JP13.10 JP13.14 JP18.1 JP19.1 R90.1 R101.A R128.1 R136.1 R157.1 R168.1 R179.A R191.1 U50.1 U50.2
+10VR: C108.1 JP6.2 JP9.2 JP9.6 JP9.10 JP9.14 JP10.2 JP10.6 JP10.10 JP10.14 JP11.2 JP13.2 Q58.EMIT R121.1 R125.1 R224.1 R225.2 R226.1 R229.2
+15: C2.1 C4.1 C6.1 C8.1 C10.1 C14.1 C19.1 C35.1 C36.1 C44.1 C48.1 C51.1 C53.1 C55.1 C57.1 C59.1 C61.1 C63.1 C65.1 C70.1 C71.1 C72.1 C79.1 C81.1 C85.1 C86.1 C87.1 C94.1 C98.1 C100.1 C102.1 C107.1 C110.1 C113.1 C115.1 C117.1 C119.1 C121.1 C123.1 JP15.1 Q57.COLL R24.1 R49.2 R51.1 R52.1 R116.1 U1.8 U2.8 U3.8 U4.8 U5.8 U7.8 U9.8 U11.8 U12.8 U13.8 U14.8 U15.8 U16.8 U17.8 U21.3 U25.13 U26.8 U27.8 U28.8 U29.13 U30.13 U31.13 U32.8 U34.8 U35.8 U37.8 U38.7 U39.5 U39.6 U39.8 U40.8 U41.8 U42.8 U43.7 U44.5 U44.6 U44.8 U45.8 U46.8 U47.8 U48.8 U49.8 U50.8 U51.8 | length 1032.8
  Bottom Layer w12: R116.1@3735,5200 4235,5200 4285,5150 4535,5150 U2.8@4685,5300
-5VR: JP13.9 JP13.13 JP18.3 JP19.3 R72.2 R134.1 R142.1 R153.2 R158.A R187.2 R192.A R212.2 R214.2 R240.2 R241.1 U51.1 U51.2 | length 4232.8
  Top Layer w12: v1(5735,2300) 5735,1975 5835,1875 R240.2@5835,1550 ; R241.1@5735,5400 5735,4325 5785,4275 5810,4250 5810,4175 5835,4150 5835,3150
  Bottom Layer w12: R72.2@5235,2300 5210,2300 v1(5735,2300) ; R214.2@5235,3150 5835,3150
-10VR: C111.2 JP9.1 JP9.5 JP9.9 JP9.13 JP10.1 JP10.5 JP10.9 JP10.13 Q59.EMIT R231.1 R235.2 R236.2
-15: C1.1 C3.1 C5.1 C7.1 C9.1 C13.1 C18.1 C33.1 C34.1 C43.1 C47.1 C50.1 C52.1 C54.1 C56.1 C58.1 C60.1 C62.1 C64.1 C69.1 C75.1 C76.1 C78.1 C80.1 C84.1 C90.1 C91.1 C93.1 C97.1 C99.1 C101.1 C106.1 C109.1 C112.1 C114.1 C116.1 C118.1 C120.1 C122.1 JP15.4 Q60.COLL U1.4 U2.4 U3.4 U4.4 U5.4 U7.4 U9.4 U11.4 U12.4 U13.4 U14.4 U15.4 U16.4 U17.4 U25.4 U26.4 U27.4 U28.4 U29.4 U30.4 U31.4 U32.4 U34.4 U35.4 U37.4 U38.4 U39.1 U39.4 U40.4 U41.4 U42.4 U43.4 U44.1 U44.4 U45.4 U46.4 U47.4 U48.4 U49.4 U50.4 U51.4
ADSR2: C22.2 R7.1 R38.2 R123.1 U14.7
ADSR_A0: U19.23 U33.14
ADSR_A1: U19.24 U33.13
ADSR_B0: U19.25 U33.2
ADSR_B1: U19.26 U33.3
AGND: C1.2 C2.2 C3.2 C4.2 C5.2 C6.2 C7.2 C8.2 C9.2 C10.2 C13.2 C14.2 C15.2 C16.2 C18.2 C19.2 C25.2 C26.2 C29.2 C30.2 C33.2 C34.2 C35.2 C36.2 C38.2 C39.2 C41.2 C42.2 C43.2 C44.2 C45.2 C46.2 C47.2 C48.2 C49.2 C50.2 C51.2 C52.2 C53.2 C54.2 C55.2 C56.2 C57.2 C58.2 C59.2 C60.2 C61.2 C62.2 C63.2 C64.2 C65.2 C66.2 C69.2 C70.2 C71.2 C72.2 C75.2 C76.2 C78.2 C79.2 C80.2 C81.2 C84.2 C85.2 C86.2 C87.2 C90.2 C91.2 C93.2 C94.2 C97.2 C98.2 C99.2 C100.2 C101.2 C102.2 C106.2 C107.2 C108.2 C109.2 C110.2 C111.1 C112.2 C113.2 C114.2 C115.2 C116.2 C117.2 C118.2 C119.2 C120.2 C121.2 C122.2 C123.2 C124.2 D6.ANOD D8.ANOD D10.CATH D12.CATH D14.CATH J1.3 J2.3 J3.3 J4.3 JP1.1 JP1.3 JP1.5 JP1.7 JP1.9 JP2.1 JP2.3 JP2.5 JP2.7 JP2.9 JP3.1 JP3.3 JP3.5 JP3.7 JP3.9 JP4.1 JP4.3 JP4.5 JP4.7 JP4.9 JP5.3 JP6.1 JP6.5 JP6.9 JP6.13 JP7.3 JP8.1 JP8.5 JP8.9 JP8.13 JP11.1 JP11.5 JP11.9 JP12.2 JP12.4 JP12.6 JP12.8 JP12.10 JP13.1 JP13.5 JP14.2 JP14.4 JP14.6 JP14.8 JP14.10 JP15.2 JP15.3 JP16.7 JP16.8 JP16.9 JP16.10 JP17.6 MC1.6 MC1.7 MC2.2 MC2.6 MC2.7 MC3.2 MC3.6 MC3.7 Q1.EMIT Q4.EMIT Q6.EMIT Q11.BASE Q12.BASE Q15.BASE Q16.BASE Q19.BASE Q20.BASE Q24.BASE Q24.COLL Q25.BASE Q28.BASE Q30.BASE Q31.BASE Q33.BASE Q35.BASE Q36.BASE Q39.BASE Q41.BASE Q43.BASE Q44.BASE Q47.BASE Q49.BASE Q52.BASE Q53.BASE Q56.BASE R6.2 R22.2 R23.2 R27.1 R32.2 R34.2 R42.2 R44.2 R56.2 R57.2 R58.2 R59.2 R64.2 R69.2 R89.A R99.2 R102.2 R117.2 R156.2 R167.A R177.2 R180.2 R190.2 R205.2 R221.1 R227.2 R232.2 R233.1 R239.1 U1.3 U7.3 U7.5 U8.2 U9.3 U10.3 U12.3 U12.5 U14.3 U14.5 U15.3 U15.5 U17.3 U17.5 U19.8 U19.22 U20.6 U20.7 U20.8 U21.2 U22.5 U23.7 U24.7 U25.5 U28.3 U28.5 U29.2 U29.5 U30.5 U31.2 U31.5 U33.1 U33.8 U33.15 U36.3 U36.4 U36.5 U36.8 U37.3 U37.5 U38.3 U40.3 U41.3 U41.5 U42.3 U42.5 U43.3 U45.3 U46.3 U46.5 U47.3 U47.5 U48.3 U48.5 U49.5 U51.5 | length 10432
  Top Layer w12: Q15.BASE@3985,750 v1(3985,1050) ; Q20.BASE@6835,2200 6835,2100 6885,2050 R239.1@6885,2000 ; v1(6835,3775) Q25.BASE@6835,3900
  Bottom Layer w12: Q16.BASE@4185,550 v1(4310,550) ; v1(4760,2850) Q53.BASE@4885,2850 ; 4760,3100 5035,3100 5085,3050 Q56.BASE@5185,3050 ; C106.2@6335,2000 6385,2000 6435,1950 6835,1950 R239.1@6885,2000 ; v1(6410,2400) Q19.BASE@6535,2400 ; v1(6410,3650) 6635,3650 6760,3775 v1(6835,3775) ; v1(8060,3000) 8385,3000 Q47.BASE@8435,3050
  Bottom Layer w30: JP16.8@185,4300 JP16.7@285,4300 JP16.9@285,4400 JP16.10@185,4400 ; 285,4350 v1(760,4350) ; JP17.6@335,3600 v1(760,3600) ; v1(3635,4300) U46.3@4385,4300 ; JP3.1@5635,1850 5735,1850 5960,1625 5985,1600 C8.2@6035,1600 ; JP13.1@7335,3250 7435,3150 R177.2@7585,3150
  Bottom Layer w50: C51.2@1835,2200 1935,2200 2035,2300 C43.2@2135,2300 ; C19.2@1835,3900 1935,3900 2035,4000 C64.2@2135,4000 ; C117.2@2835,2100 2910,2100 3010,2200 C118.2@3135,2200 ; C119.2@2835,2700 2885,2700 2985,2800 C60.2@3135,2800 ; U14.3@4385,650 4435,650 4485,600 4635,600 U14.5@4685,550 ; C55.2@4385,1650 4485,1650 4585,1750 C13.2@4685,1750 ; U47.3@4385,3600 4485,3600 4585,3500 U47.5@4685,3500 ; C102.2@4385,3900 4460,3975 4760,3975 4760,3950 ; C100.2@4385,4600 4385,4725 4560,4900 C3.2@4685,4900 ; C107.2@6035,2500 6035,2525 6210,2700 C114.2@6310,2700 ; C87.2@7685,2200 7760,2200 7910,2350 C90.2@7985,2350 ; C79.2@8835,1600 8960,1600 9060,1700 C76.2@9135,1700 ; C72.2@8835,2200 8935,2200 9085,2350 C75.2@9135,2350
B1: U8.4 U19.15 U24.3
B2: U19.16 U24.11
B3: U8.5 U20.13
B5: U8.6 U20.3
B6: C15.1 U19.9 Y1.2
B7: C16.1 U19.10 Y1.1
BP: C95.1 JP2.4 JP6.6 R204.1 U47.1
C4: JP16.5 U19.27
C5: JP16.6 U19.28
C6: JP17.5 U19.1 U20.9 U20.10 U20.11
CMP_A: D6.CATH R118.2 R120.2 U19.11
CMP_B: D8.CATH R122.2 R124.2 U20.1
D0: R79.2 U19.2 U22.4 U23.1
D1: U19.3 U23.5
D2: U19.4 U24.9 U36.6
D3: U19.5 U36.1
D4: U19.6 U36.2
DGND: C40.2
FAW1: JP6.12 U2.5
FAW2: JP6.16 U2.3
FFP: JP6.4 R207.1
FQP: JP6.8 R199.2
GND_SIGNAL: U16.3
GRATE: JP13.4 R70.1
GRH: JP13.6 R109.1 U26.6 U26.7
GRW: JP13.8 U1.5
HP: JP2.6 R201.2 R203.1 U46.7
LP: C96.1 JP2.2 R200.2 U48.1
MCLK: J2.1 R8.1 U19.12
MISO: JP17.1 U20.2
MOSI: JP17.4 U20.12
MRST: J4.1 R15.1 U19.14
MSS: J3.1 R12.1 U19.13
N00107: Q10.EMIT Q11.EMIT Q12.EMIT Q13.EMIT R33.2
N00107_21702: Q14.EMIT Q15.EMIT Q16.EMIT Q17.EMIT R43.2
N00110: C31.1 Q25.COLL Q27.COLL U16.2
N00113: C25.1 R49.1 R50.1 R53.1 R54.1
N00120: R144.1 R145.2 U2.2
N00120_26784: R126.1 R127.2 U3.2
N00120_26805: R148.1 R149.2 U4.6
N00120_26826: R146.1 R147.2 U2.6
N00120_26919: R114.1 R115.2 U5.6
N00120_26940: R150.1 R151.2 U4.2
N00120_26961: R110.1 R111.2 U5.2
N00120_26988: R112.1 R113.2 U3.6
N00120_27009: R108.1 R109.2 U1.6
N00130: C26.1 R50.2 R55.1
N00138: C20.1 Q10.COLL Q12.COLL U12.6
N00138_21695: C22.1 Q14.COLL Q16.COLL U14.6
N00157: C73.1 Q35.COLL Q40.SOUR U38.2
N00157_6961: C88.1 Q43.COLL Q48.SOUR U43.2
N00165: Q57.EMIT Q58.BASE R225.1
N00200: C28.1 Q24.EMIT R55.2
N00212: Q38.EMIT Q39.EMIT R153.1
N00212_7256: Q46.EMIT Q47.EMIT R187.1
N00216: Q57.BASE Q58.COLL R228.1
N00219: C96.2 Q54.COLL Q56.COLL U48.2
N00227: C73.2 Q40.DRAI R154.1
N00227_28776: C88.2 Q48.DRAI R188.1
N00235: R73.2 R74.2 R75.2 R76.1 R77.2 R78.2 U1.2
N00246: C23.1 Q15.COLL Q17.COLL R40.2 U14.2
N00246_21585: C21.1 Q11.COLL Q13.COLL R30.2 U12.2
N00250: Q33.EMIT Q34.EMIT R152.2
N00250_7257: Q41.EMIT Q42.EMIT R186.2
N00259: D4.CATH R80.2 U22.1
N00265: U24.5 U24.12
N00268: C74.1 R155.2 U39.2
N00268_28769: C89.1 R189.2 U44.2
N00279: R157.2 U39.3
N00279_28774: R191.2 U44.3
N00288: C74.2 Q40.GATE R156.1 U39.7
N00288_28770: C89.2 Q48.GATE R190.1 U44.7
N00300: R228.2 U50.7
N00316: U24.1 U24.8
N00385: Q49.EMIT Q50.EMIT R211.2
N00385_7910: C95.2 Q50.COLL Q52.COLL U47.2
N00385_8165: Q53.EMIT Q54.EMIT R213.2
N00385_26852: Q29.EMIT Q30.EMIT R71.2
N00385_29046: Q18.EMIT Q19.EMIT Q20.EMIT Q21.EMIT R48.1
N00407: C68.1 Q37.COLL R90.2 U37.2
N00407_6955: C83.1 Q45.COLL R168.2 U42.2
N00421: D13.ANOD D14.ANOD
N00425: Q51.EMIT Q52.EMIT R212.1
N00425_8159: Q55.EMIT Q56.EMIT R214.1
N00425_26846: Q31.EMIT Q32.EMIT R72.1
N00444: R158.B R158.WIPE R159.1
N00444_7401: R192.B R192.WIPE R193.1
N00448: C68.2 R100.2 U37.1
N00448_6956: C83.2 R178.2 U42.1
N00455: C23.2 R43.1 U14.1
N00455_21583: C21.2 R33.1 U12.1
N00469: R219.1 R220.2 R222.2 R237.1 U15.2
N00484: C103.2 R211.1 U47.7
N00484_8164: C104.2 R213.1 U48.7
N00484_26851: C37.2 R71.1 U7.1
N00484_29043: C24.2 R48.2 U15.7
N00506: R159.2 R160.1 R161.2 U40.2
N00506_7394: R193.2 R194.1 R195.2 U45.2
N00591: R229.1 R232.1 U50.6
N00592: C105.1 Q19.COLL Q21.COLL U49.6
N00597: Q36.COLL R88.2 U28.6
N00597_6959: Q44.COLL R166.2 U41.6
N00627: R217.2 U49.2
N00630: R215.1 R221.2 U49.3
N00647: R128.2 R129.1 U34.5
N00647_25492: R136.2 R137.1 U35.5
N00650: R215.2 R218.1 U49.1
N00661: Q10.BASE Q13.BASE R34.1 R37.2
N00661_30560: Q14.BASE Q17.BASE R44.1 R47.2 | length 612.1
  Bottom Layer w12: Q14.BASE@3985,550 3910,550 3885,575 3885,725 3960,800 4135,800 Q17.BASE@4185,750
N00686: R88.1 R89.B U28.7
N00686_6954: R166.1 R167.B U41.7
N00707: R130.1 R131.1 U34.6
N00707_25493: R138.1 R139.1 U35.6
N00729: C30.1 Q23.EMIT R59.1
N00758: C27.1 Q23.COLL R54.2
N00787: C28.2 Q23.BASE R53.2 R58.1
N00793: C49.1 U25.6 U27.3
N00807: R131.2 R132.B R132.WIPE
N00807_25495: R139.2 R140.B R140.WIPE
N00824: R162.2 U40.6
N00824_7396: R196.2 U45.6
N00840: C46.1 U25.11 U27.5
N00853: R164.2 U40.5
N00853_7399: R198.2 U45.5
N00882: R163.1 U40.7
N00882_7395: R197.1 U45.7
N000890: MC1.4 R80.1
N000891: D4.ANOD MC1.5 U22.2
N000892: MC2.4 R81.1
N000893: MC2.5 R83.2
N000894: MC3.4 R86.1
N000895: MC3.5 R84.2
N00902: C45.1 U25.14 U26.5
N00928: R132.A R133.1 U34.2
N00928_25496: R140.A R141.1 U35.2
N00930: C27.2 Q22.BASE R51.2 R56.1
N00949: C42.1 U25.3 U26.3
N00982: R129.2 R134.2 U34.3
N00982_25494: R137.2 R142.2 U35.3
N00994: Q59.BASE Q60.EMIT R236.1
N01008: C29.1 Q22.EMIT R57.1
N01029: R199.1 R200.1 R201.1 R202.2 U46.6
N001073: Q35.EMIT Q36.EMIT Q37.EMIT R100.1
N001073_6962: Q43.EMIT Q44.EMIT Q45.EMIT R178.1
N001076: Q34.COLL Q37.BASE Q39.COLL R99.1
N001076_6963: Q42.COLL Q45.BASE Q47.COLL R177.1
N01092: Q59.COLL Q60.BASE R234.1
N01097: C67.1 Q33.COLL Q38.COLL R91.2 R92.1 R94.2 R95.2 R97.2 R103.2 U37.6
N01097_6957: C82.1 Q41.COLL Q46.COLL R169.2 R170.1 R172.2 R173.2 R175.2 R181.2 U42.6
N01255: R31.1 U29.3 U30.14 U31.14
N01321: C67.2 R152.1 U37.7
N01321_7264: C82.2 R186.1 U42.7
N01393: R226.2 R235.1 U51.6
N01433: R116.2 R117.1 U29.10 U30.15
N01478: C125.1 Q22.COLL R52.2
N01531: R234.2 U51.7
N01951: C17.2 U8.1 U9.2
N02002: R154.2 R155.1 R161.1 U38.6
N02002_6965: R188.2 R189.1 R195.1 U43.6
N02033: C17.1 U8.8 U9.1 U25.2 U25.7 U25.10 U25.15
N02052: U11.3 U29.6 U30.6 U30.11
N02336: R28.1 R29.1 U11.6
N02336_21696: R38.1 R39.1 U13.6
N02351: R104.1 R105.2 R106.2 R107.2 U28.2
N02351_6966: R182.1 R183.2 R184.2 R185.2 U41.2
N02407: R31.2 R32.1 U11.5
N02407_21693: R41.2 R42.1 U13.5
N02463: R104.2 R164.1 U28.1
N02463_6974: R182.2 R198.1 U41.1
N02486: R29.2 R30.1 U11.7
N02486_21697: R39.2 R40.1 U13.7
N02630: R21.2 R23.1 U9.5
N02692: R19.1 R20.2 R22.1 U9.6
N02779: R19.2 U8.7 U9.7
N02795: Q50.BASE Q51.BASE Q54.BASE Q55.BASE R205.1 R206.2
N02906: R207.2 R208.2 R209.1 R210.2 R241.2 U46.2 | length 1147.5
  Top Layer w12: v1(4985,5250) 4985,4900 5010,4875 v1(5010,4700)
  Bottom Layer w12: R207.2@4835,4700 v1(5010,4700) ; v1(4985,5250) 5085,5250 5185,5350 5285,5350 R241.2@5335,5400
N02971: R231.2 R233.2 U51.3
N03009: R206.1 R209.2 U46.1
N03023: R224.2 R227.1 U50.3
N03130: U19.17 U20.14
N03151: R41.1 U29.11 U30.3 U31.3
N03212: U13.3 U29.14 U31.6 U31.11
N03294: U19.18 U20.15
N03371: U19.19 U20.4
N03493: R25.2 R26.B
N03525: R26.A R27.2
N03595: R26.WIPE U10.1
N03974: JP10.4 U31.10
N04028: JP10.8 U29.15
N04082: JP10.12 U30.2
N04136: JP10.16 U31.7
N04190: JP9.4 U29.7
N04244: JP9.8 U30.7
N04298: JP9.12 U31.15
N04352: JP9.16 U30.10
N04437: Q34.BASE Q38.BASE R98.2 R102.1
N04437_27642: Q42.BASE Q46.BASE R176.2 R180.1
N04535: R98.1 R101.B R101.WIPE
N04535_27643: R176.1 R179.B R179.WIPE
N05851: Q25.EMIT Q26.EMIT Q27.EMIT Q28.EMIT R67.1
N05991: C32.1 Q26.COLL Q28.COLL R62.2 U17.6
N06126: R121.2 U32.5
N06155: R119.2 U32.6
N06184: D5.CATH U32.7
N06213: D5.ANOD R120.1
N06293: R89.WIPE R92.2
N06293_28527: R167.WIPE R170.2
N06305: R37.1 U11.1 U11.2
N06305_30559: R47.1 U13.1 U13.2
N06379: D7.ANOD R124.1
N06392: C32.2 R67.2 U17.7
N06406: D7.CATH U32.1
N06428: R87.A R91.1
N06428_28529: R165.A R169.1
N06435: R123.2 U32.2
N06457: JP18.2 R87.B R87.WIPE
N06457_28528: JP19.2 R165.B R165.WIPE
N06464: R125.2 U32.3
N06816: Q26.BASE Q27.BASE R68.2 R69.1
N007300: D9.ANOD D10.ANOD
N007300_7405: D11.ANOD D12.ANOD
N07770: C31.2 R61.1 R94.1 R172.1 U16.1
N07916: R76.2 R202.1 U1.1
N08119: JP4.2 R160.2 R162.1 U40.1
N08148: R60.1 R61.2 U16.6
N08154: D9.CATH JP4.4 R163.2
N08181: R63.2 R64.1 U16.5
N08189: JP4.6 R194.2 R196.1 U45.1
N08231: D11.CATH JP4.8 R197.2
N08273: C125.2 JP4.10
N08282: R60.2 R62.1 U16.7
N08475: R65.2 R66.1 R70.2 U17.2
N08967: R63.1 U26.1 U26.2
N09931: R107.1 R126.2 R185.1 U3.1
N10005: R106.1 R112.2 R184.1 U3.7
N10050: R103.1 R110.2 R181.1 U5.1
N10095: R97.1 R114.2 R175.1 U5.7
N10142: R65.1 R108.2 U1.7
N10702: R66.2 R68.1 U17.1
N12555: JP5.1 R130.2 U34.7
N12578: JP5.4 R133.2 U34.1
N12623: JP7.1 R138.2 U35.7
N12646: JP7.4 R141.2 U35.1
N13774: R146.2 R208.1 U2.7
N13826: R144.2 R210.1 U2.1
N15043: C24.1 Q18.COLL Q20.COLL R216.2 U15.6
N15368: C37.1 Q29.COLL Q31.COLL R2.2 R3.2 R4.2 U7.2
N15490: Q29.BASE Q32.BASE R6.1 R7.2 R240.1
N16526: U27.1 U27.2
N17552: Q30.COLL Q32.COLL R1.1 U7.6
N17643: J1.1 R1.2 U7.7
N18449: Q18.BASE Q21.BASE R238.2 R239.2
N18572: JP3.6 R4.1
N18648: JP3.4 R3.1
N18724: JP3.2 R2.1
N19145: R148.2 R220.1 U4.7
N19184: R150.2 R219.2 U4.1
N19338: JP11.8 U4.5
N19399: JP11.12 U4.3
N19467: JP11.4 R222.1
N19582: R237.2 R238.1 U15.1
N19912: JP11.6 R149.1 U27.6 U27.7
N031960: JP1.2 R73.1
N031961: JP1.4 R74.1
N031962: JP1.6 R75.1
N031963: JP1.8 R77.1
N031964: JP1.10 R78.1
N45972: R9.1 U29.8 U30.16 U33.12
N45998: R11.1 U30.8 U31.16 U33.11
N46024: R14.1 U29.1 U30.9 U33.10
N46050: R16.1 U29.9 U31.9 U33.4
N46076: R17.1 U29.16 U30.1 U33.5
N46102: R18.1 U31.1 U31.8 U33.6
N46128: JP12.1 Q2.COLL
N46185: JP12.5 Q3.COLL
N46242: JP12.7 Q5.COLL
N46299: JP14.1 Q7.COLL
N46356: JP14.5 Q8.COLL
N046401: C103.1 Q49.COLL Q51.COLL R203.2 U47.6
N46443: JP14.7 Q9.COLL
N048080: C104.1 Q53.COLL Q55.COLL R204.2 U48.6
N51869: D3.CATH R13.2
N51896: D2.CATH R10.2
N51923: Q1.COLL R5.1